# EAGLE board Board 2 (EAGLE 9.6.2)
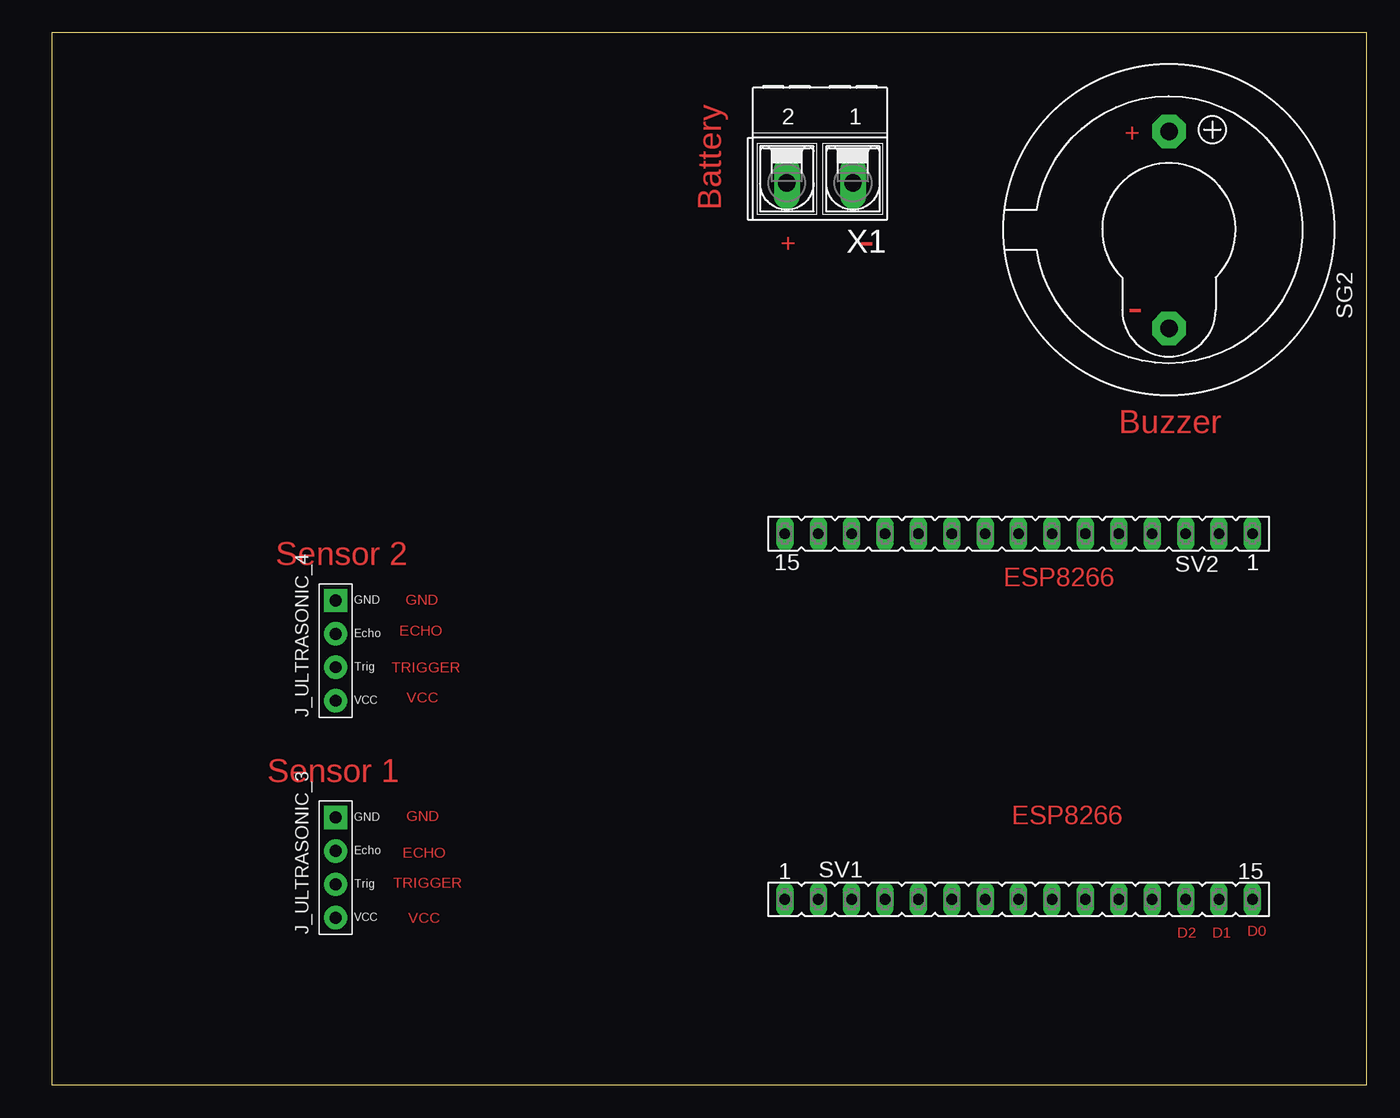
[diagram p0: board, top side]
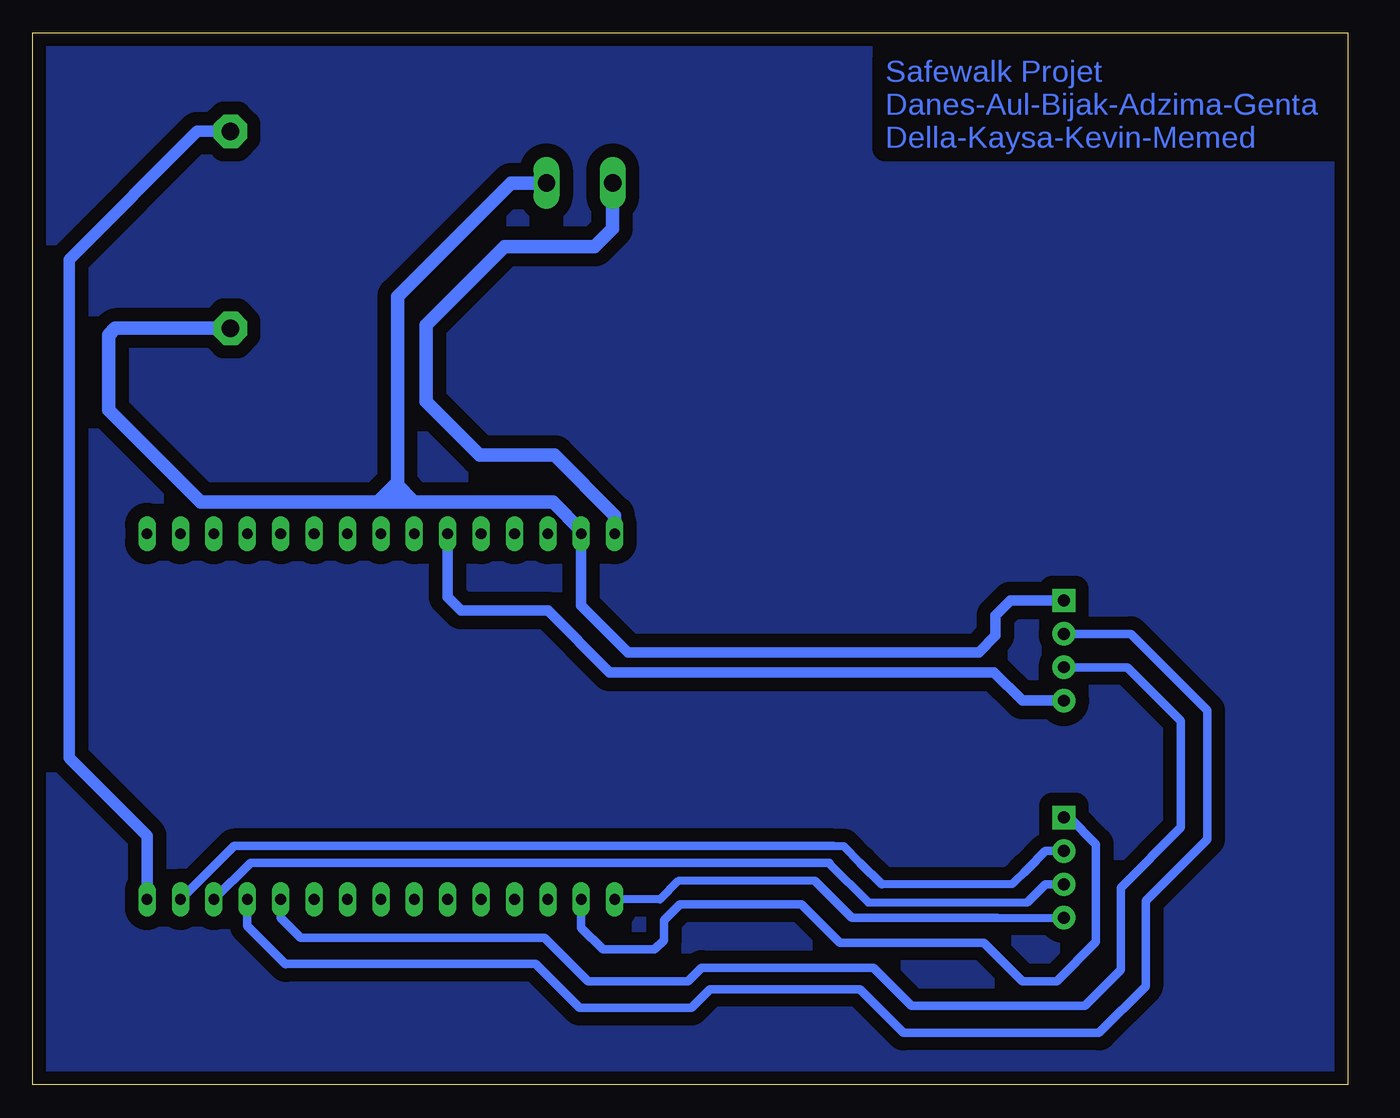
[diagram p1: board, bottom side, seen from below]

Size 100 x 80 mm. Coordinates in mm from the lower left corner, seen from the top.
Outline: 0,0 100,0 100,80 0,80 0,0
Copper layers (1*16): Top 0.035mm / dielectric 1.5mm / Bottom 0.035mm
Design rules "default *": minimum track width 6mil, minimum drill 0.35mm, track to track 40mil, track to pad 40mil, pad to pad 40mil, via to via 40mil, smd to smd 40mil, copper to edge 40mil, drill to drill 6mil, minimum pad ring 10mil, minimum via ring 8mil, stop-mask expansion 4mil, vias tented up to drill 0mil, thermal gap 10mil

## Footprints (pad centres in the part's own frame; a part is rotated, then mirrored left to right if it is on the bottom)
HC-SR04_FOOTPRINT = drill 0.9 pad 1.778: ECHO 0,1.27; TRIG 0,-1.27; VCC 0,-3.81 | drill 0.9 pad 1.778 square: GND 0,3.81
EB2505 = drill 1.321 pad 2.54 octagon: + -7.493,0; - 7.493,0
FE15 = drill 0.813 long: 1 -17.78,0; 2 -15.24,0; 3 -12.7,0; 4 -10.16,0; 5 -7.62,0; 6 -5.08,0; 7 -2.54,0; 8 0,0; 9 2.54,0; 10 5.08,0; 11 7.62,0; 12 10.16,0; 13 12.7,0; 14 15.24,0; 15 17.78,0
AK500/2-H = drill 1.321 long: 1 -2.515,0; 2 2.515,0

## Placement (x,y rotation side)
J_ULTRASONIC_3  HC-SR04  [HC-SR04_FOOTPRINT]  21.59,16.51 0 top
J_ULTRASONIC_4  HC-SR04  [HC-SR04_FOOTPRINT]  21.59,33.02 0 top
SG2  EB2505  [EB2505]  84.96,65.02 270 top
SV1  [FE15]  73.53,14.1 0 top
SV2  [FE15]  73.53,41.91 180 top
X1  [AK500/2-H]  58.42,68.58 180 top

## Library data of the parts
J_ULTRASONIC_3 J_ULTRASONIC_4 = Ultrasonic Sensor HC-SR04
SG2 = buzzer; OC_FARNELL: unknown; OC_NEWARK: unknown
SV1 SV2 = con-lsta; OC_FARNELL: unknown; OC_NEWARK: unknown
X1 = con-ptr500; OC_FARNELL: unknown; OC_NEWARK: unknown

## Nets
N$1: J_ULTRASONIC_3.ECHO SV1.14
N$2: J_ULTRASONIC_3.TRIG SV1.13
N$3: J_ULTRASONIC_3.GND SV1.2
N$4: J_ULTRASONIC_3.VCC SV1.1
N$5: J_ULTRASONIC_4.GND SG2.- SV2.14 X1.1
N$6: SV2.15 X1.2
N$7: SG2.+ SV1.15
N$8: J_ULTRASONIC_4.ECHO SV1.12
N$9: J_ULTRASONIC_4.TRIG SV1.11
N$10: J_ULTRASONIC_4.VCC SV2.10

## Tracks (layer width: path | path; a pad name or v marks a point on that pad's centre or on a via)
N$1
  Bottom 0.61: 37.08,16.89 38.35,18.16 39.88,18.16 | 24.38,16.38 25.53,15.24 35.43,15.24
  Bottom 0.635: 39.12,18.16 39.88,18.16 84.71,18.16 SV1.14 | J_ULTRASONIC_3.ECHO 22.99,17.78 24.38,16.38 24.64,16.13 | 35.43,15.24 37.08,16.89
N$2
  Bottom 0.61: 39.43,16.83 39.43,16.89 | 39.49,16.89 36.46,13.86 24.37,13.86
  Bottom 0.635: SV1.13 83.44,16.89 39.49,16.89 39.43,16.89 | J_ULTRASONIC_3.TRIG 22.99,15.24 24.37,13.86
N$3
  Bottom 0.635: J_ULTRASONIC_3.GND 21.18,20.32 19.14,18.29 19.14,10.86 22.13,7.87 24.77,7.87 27.69,10.79 38.61,10.79 41.53,13.72 50.8,13.72 52,12.52 52,10.99 52.7,10.29 56.64,10.29 58.29,11.94 SV1.2
N$4
  Bottom 0.61: 40.51,15.49 50.93,15.49 52.32,14.1 SV1.1 | 26.67,12.7 J_ULTRASONIC_3.VCC
  Bottom 0.635: 40.51,15.49 37.72,12.7 26.67,12.7
N$5
  Bottom 0.813: J_ULTRASONIC_4.GND 25.65,36.83 26.8,35.69 26.8,34.16 28.07,32.89 54.74,32.89 58.29,36.45 SV2.14 58.29,40.51
  Bottom 1.016: SV2.14 58.29,42.16 60.45,44.32 70.99,44.32 | SG2.- 93.73,57.53 94.23,57.02 94.23,51.31 87.25,44.32 73.79,44.32 | 73.79,44.32 72.26,44.32 | 72.26,44.32 70.99,44.32 | 70.99,44.32 72.39,45.72 73.79,44.32 | 72.26,44.32 72.26,59.94 63.63,68.58 X1.1
N$6
  Bottom 1.016: X1.2 55.91,65.13 57.28,63.75 64.14,63.75 70.1,57.78 70.1,51.94 66.04,47.88 60.33,47.88 55.75,43.31 SV2.15
N$7
  Bottom 0.889: SG2.+ 87.5,72.52 97.25,62.77 97.25,24.86 91.31,18.92 SV1.15
N$8
  Bottom 0.635: J_ULTRASONIC_4.ECHO 16.51,34.29 10.67,28.45 10.67,18.67 15.37,13.97 15.37,7.49 18.92,3.94 33.78,3.94 37.08,7.24 48.51,7.24 49.91,5.84 58.42,5.84 61.76,9.19 80.81,9.19 | SV1.12 83.69,12.06 80.81,9.19 | 80.77,9.14 80.81,9.19
N$9
  Bottom 0.635: SV1.11 81.15,12.7 79.63,11.18 61.09,11.18 57.78,7.87 50.16,7.87 49.15,8.89 36.07,8.89 33.18,6 20,6 17.27,8.73 17.27,14.99 12.7,19.56 12.7,27.69 16.76,31.75 J_ULTRASONIC_4.TRIG
N$10
  Bottom 0.813: J_ULTRASONIC_4.VCC 24,29.21 24.64,29.21 24.76,29.21 26.92,31.37 56.13,31.37 60.83,36.07 67.44,36.07 68.45,37.08 SV2.10
TEST
  pour Bottom: 0,80 100,80 100,0 0,0
  pour Bottom: 0,80 0,0 100,0 100,80

## Text on the board
Top: + | Battery | + | - | - | Buzzer | Sensor 2 | ESP8266 | GND | ECHO | TRIGGER | VCC | Sensor 1 | ESP8266 | GND | ECHO | TRIGGER | VCC | D2 | D1 | D0
Bottom: Safewalk Projet / Danes-Aul-Bijak-Adzima-Genta / Della-Kaysa-Kevin-Memed